# Altium PCB lb-charDisplay-PCB1.PcbDoc
Units mm, origin at the board's own origin, x right, y up, seen from the top; angles counter-clockwise.
Board outline 48 x 70 mm, 2 copper layers (Top Layer, Bottom Layer); 57 components, 58 nets, 230 pads, 272 vias.
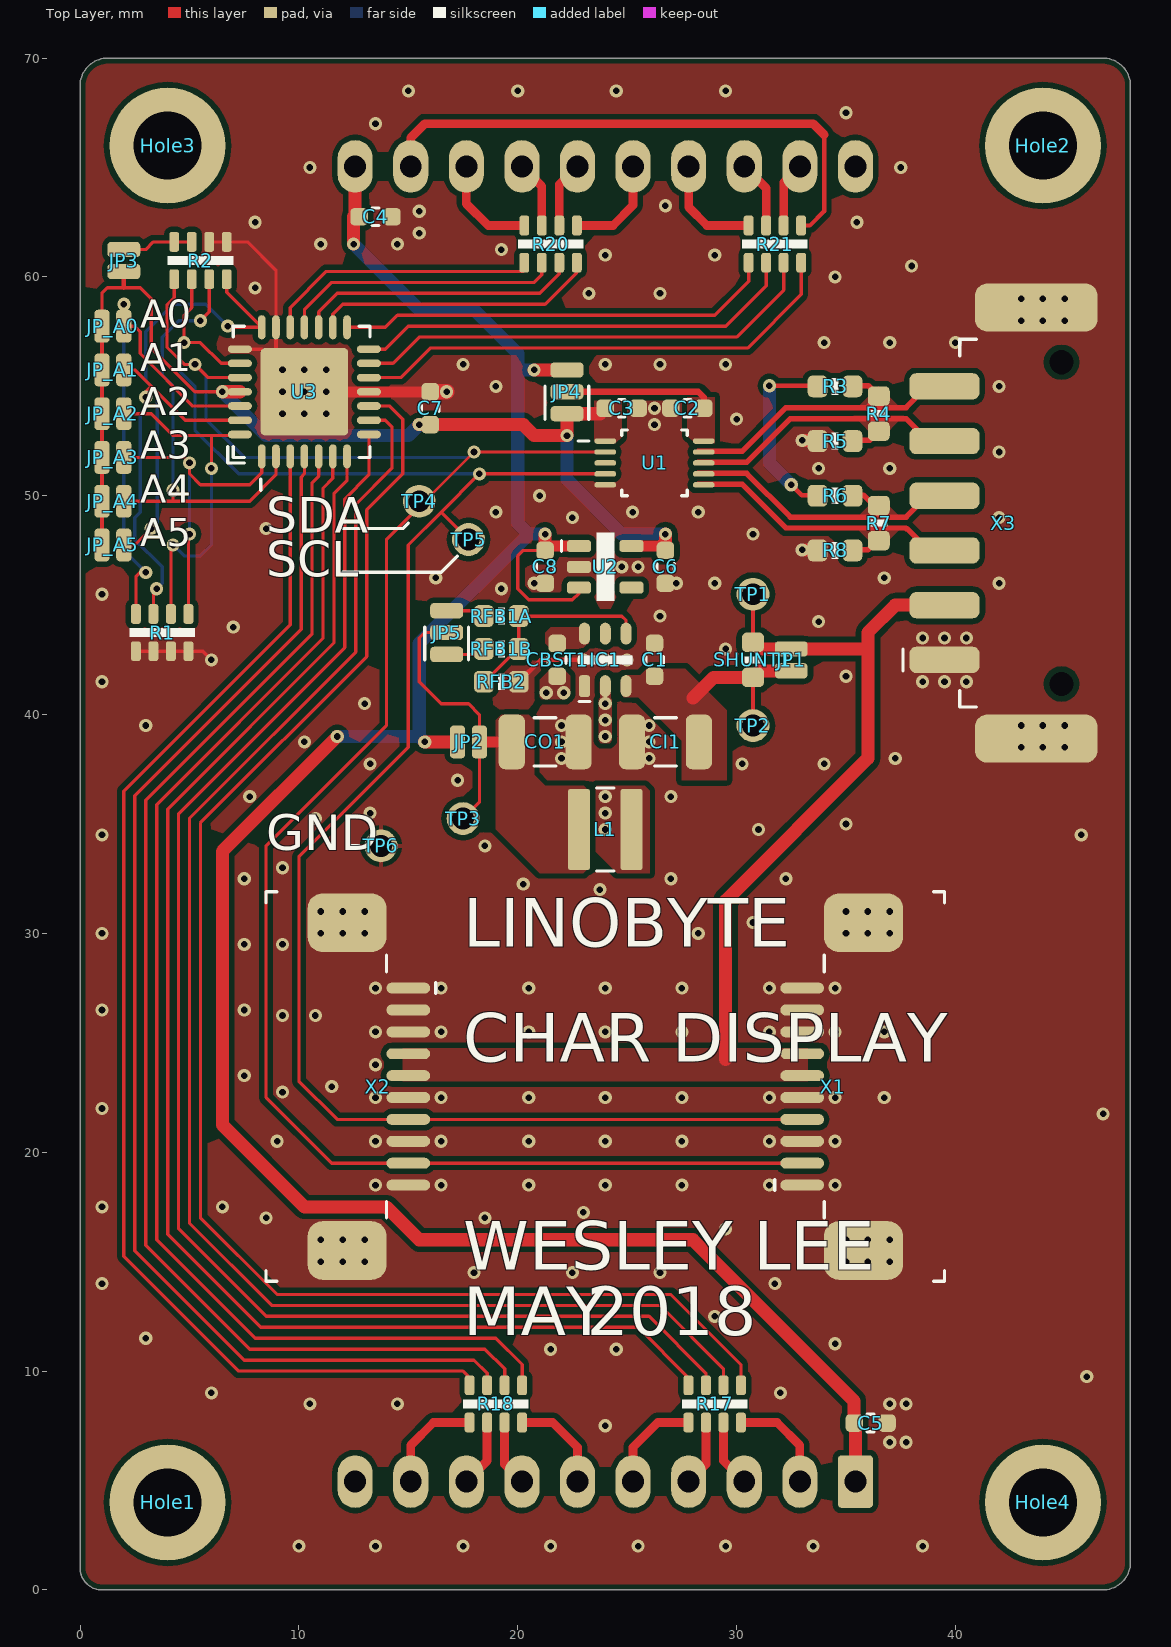
[diagram p0: Top Layer view]
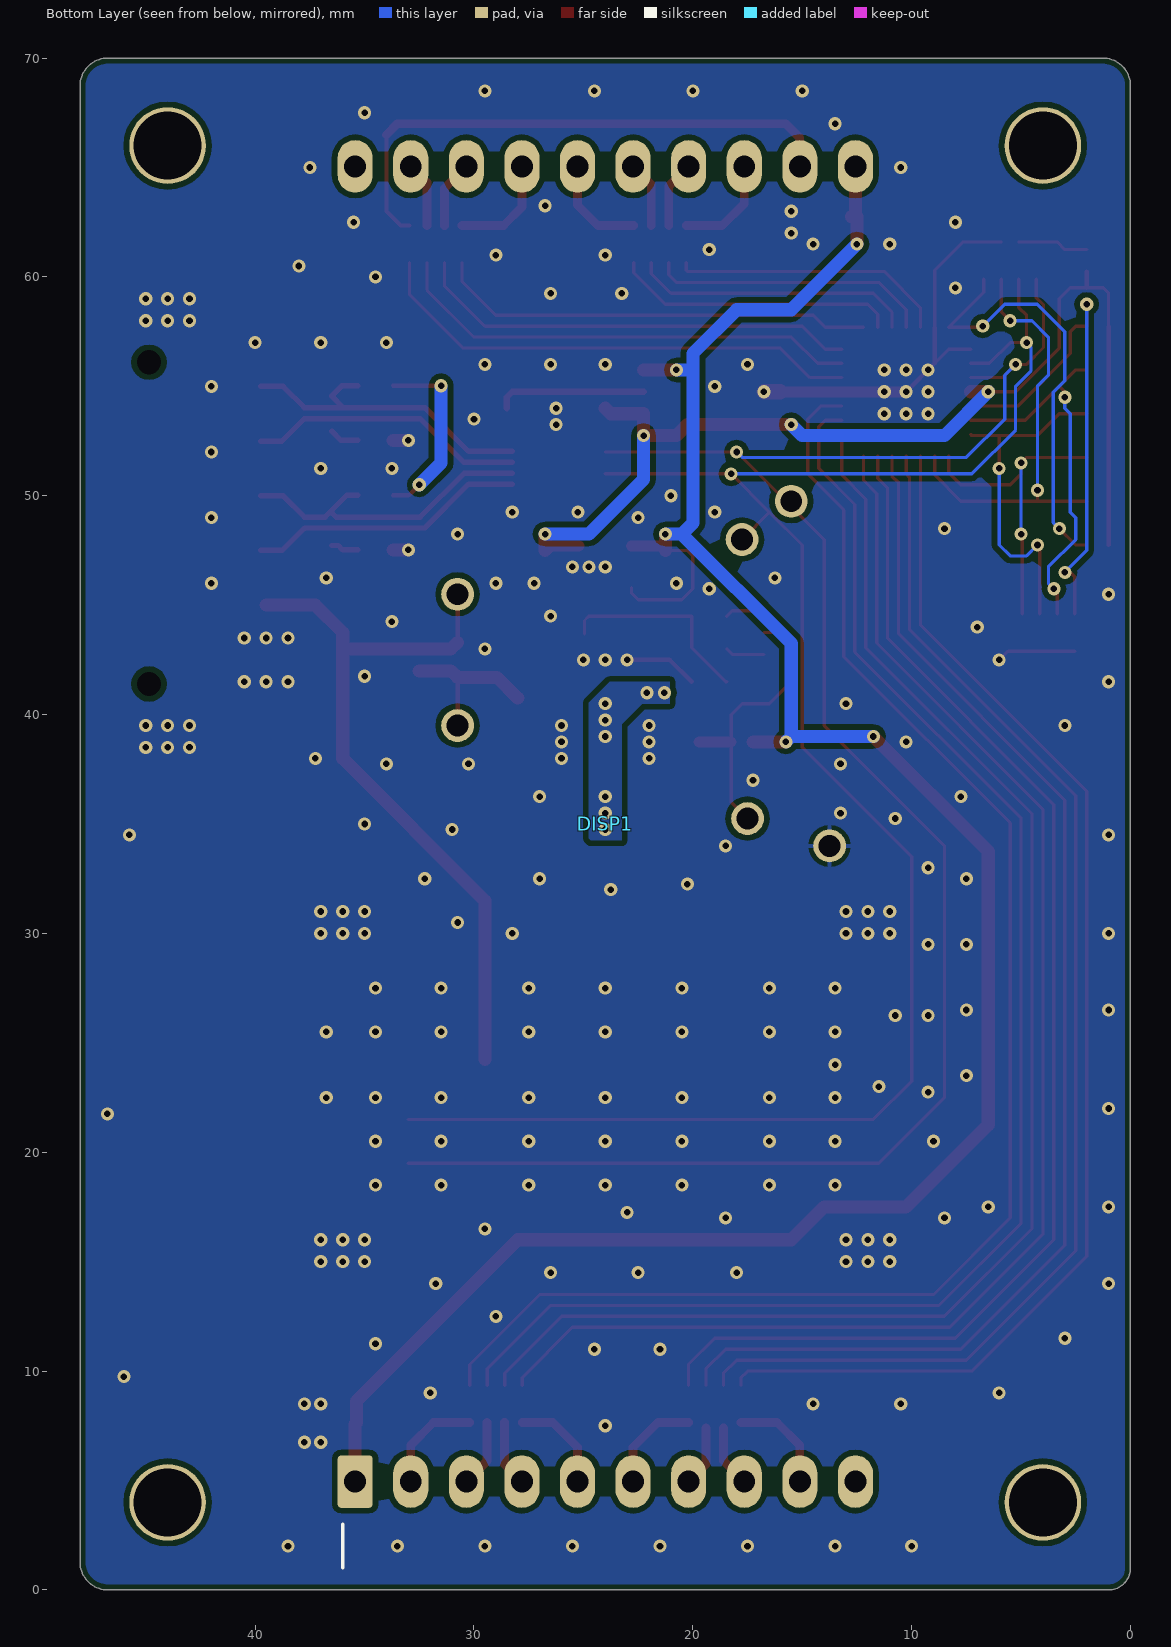
[diagram p1: Bottom Layer view, seen from below]

## Layer stack, top to bottom
Top Solder: solder mask 0.0102, Solder Resist, Dk 3.5
Top Layer: signal copper 0.0356
Dielectric 1: dielectric 0.32, FR-4, Dk 4.8
Bottom Layer: signal copper 0.0356
Bottom Solder: solder mask 0.0102, Solder Resist, Dk 3.5

## Board outline
0,1 0,68.73 cw(c1.27,68.73) 1.27,70 46.73,70 cw(c46.73,68.73) 48,68.73 48,1.27 cw(c46.73,1.27) 46.73,0 1,0 cw(c1,1)

## Design rules (kind name [scope] priority, off if disabled: settings)
BoardOutlineClearance BoardOutlineClearance-Mid [OnLayer('Mid1') or OnLayer('Mid2')] p1: gap=0.5 ignorepadtopadclearanceinfootprint=FALSE
BoardOutlineClearance [All] p2: gap=0.25 ignorepadtopadclearanceinfootprint=FALSE except(0: Arc-SplitContinuation Track-SplitContinuation SMDPad-SplitContinuation THPad-SplitContinuation Via-SplitContinuation Fill-SplitContinuation Poly-SplitContinuation Region-SplitContinuation Text-SplitContinuation)
Clearance Clearance-xPP-xTP-xTT [All] p1: gap=0.15 ignorepadtopadclearanceinfootprint=FALSE except(0: Arc-Hole Track-Hole SMDPad-Hole THPad-Hole Via-Hole Fill-Hole Poly-Hole Region-Hole Text-Hole; 0.25: Arc-Fill Arc-Poly Arc-Region Track-Fill Track-Poly Track-Region SMDPad-Fill SMDPad-Poly SMDPad-Region THPad-Fill THPad-Poly THPad-Region Via-Fill Via-Poly Via-Region Fill-Fill Fill-Poly Fill-Region Poly-Poly Poly-Region Region-Region)
ComponentClearance [All] p1: gap=0.25 collisioncheckmode=3 verticalgap=0.25 showdistances=FALSE
DiffPairsRouting USB_DiffPairsRouting [InDifferentialPair ('USB') or InDifferentialPair ('DI') or InDifferentialPair ('DSCL') or InDifferentialPair ('DSDA')] p1: maxlimit=0.25 minlimit=0.25 mostfreqgap=0.25 toplayer_minwidth=0.25 toplayer_maxwidth=0.25 toplayer_prefwidth=0.25 bottomlayer_minwidth=0.25 bottomlayer_maxwidth=0.25 bottomlayer_prefwidth=0.25 maxuncoupledlength=12.7
DiffPairsRouting [All] p2: maxlimit=0.254 minlimit=0.254 mostfreqgap=0.254 toplayer_minwidth=0.381 toplayer_maxwidth=0.381 toplayer_prefwidth=0.381 bottomlayer_minwidth=0.381 bottomlayer_maxwidth=0.381 bottomlayer_prefwidth=0.381 maxuncoupledlength=12.7
Height [All] p1: minheight=0 maxheight=25 prefheight=12.5
HoleSize HoleSize-PTH [All] p1: absolutevalues=TRUE maxlimit=6 minlimit=0.25 maxpercent=80.000 minpercent=20.000
HoleToHoleClearance [All] p1: gap=0.35 allowstackedmicrovias=FALSE
MinimumAnnularRing "Minimum IAR  >0.45mm" [((ObjectKind = 'Pad') OR (ObjectKind = 'Via')) And (Layer = 'MultiLayer') And (HoleDiameter > AsMM(0.45))] p1: minimumring=0.175 // minimum inner annular ring for pads > 0.45mm finished hole size
MinimumAnnularRing "Minimum IAR <=0.45mm" [((ObjectKind = 'Pad') OR (ObjectKind = 'Via')) And (Layer = 'MultiLayer') And (HoleDiameter <= AsMM(0.45))] p2: minimumring=0.15 // minimum inner annular ring for pads <= 0.45mm finished hole size
MinimumSolderMaskSliver [All] p1: minsoldermaskwidth=0.3
PlaneClearance PlaneClearance-IPI [All] p1: clearance=0.5
PlaneConnect [All] p1: planeconnectstyle=Relief reliefexpansion=0.2 reliefentries=4 reliefconductorwidth=0.2 reliefairgap=0.2
PolygonConnect PolygonConnect-xTW [All] p1: thpad.connectstyle=Relief thpad.reliefconductorwidth=0.2 thpad.reliefentries=4 thpad.polygonreliefangle="90 Angle" thpad.airgapwidth=0.2 smdpad.connectstyle=Direct smdpad.reliefconductorwidth=0.2 smdpad.reliefentries=4 smdpad.polygonreliefangle="90 Angle" smdpad.airgapwidth=0.2 via.connectstyle=Direct via.reliefconductorwidth=0.2 via.reliefentries=4 via.polygonreliefangle="90 Angle" via.airgapwidth=0.2
RoutingCorners [All] p1: cornerstyle=45-Degree minsetback=2 maxsetback=2
RoutingVias "RoutingVias 0.3mm" [All] p1: holewidth=0.3 width=0.6 viastyle="Through Hole" minholewidth=0.3 minwidth=0.6 maxholewidth=0.5 maxwidth=0.8 // finishet hole size <= 0.45mm
SilkToSilkClearance [All] p1: silktosilkclearance=0.2
SilkToSolderMaskClearance SilkscreenOverComponentPads [IsPad] p1: minsilkscreentomaskgap=0.15 clearancetoexposedcopper=TRUE
SolderMaskExpansion "0.3mm Via" [(ObjectKind = 'Via') And (HoleDiameter = AsMM(0.3))] p1: expansion=-0.15 soldermaskfromhole=TRUE
SolderMaskExpansion [All] p2: expansion=0
UnRoutedNet [All] p1: checkbadconnections=TRUE
Width Width-xTW [All] p1: maxlimit=1.5 minlimit=0.15 preferedwidth=0.2
18 further rules are at their usual default settings.

## Classes and differential pairs
component class U_lb-charDisp-SMPS5V: C1 CBST1 CI1 CO1 IC1 JP1 JP2 JP5 L1 RFB1A RFB1B RFB2 SHUNT1 TP1 TP2 TP3
component class lb-charDisp-topLevel: C2 C3 C4 C5 C6 C7 C8 DISP1 Hole1 Hole2 Hole3 Hole4 JP3 JP4 JP_A0 JP_A1 JP_A2 JP_A3 JP_A4 JP_A5 R1 R2 R3 R4 R5 R6 R7 R8 R17 R18 R20 R21 TP4 TP5 TP6 U1 U2 U3 X1 X2 X3
differential pair DSDA: +DSDA_P -DSDA_N
differential pair DSCL: +DSCL_P -DSCL_N

## Components (designator, comment, footprint, x,y, rotation, side; value= is the part's Value field where it differs from the comment)
C1 "100nF" C0603_N 26.25,42.5 r90 top
C2 "100nF" C0603_N 27.75,54 r180 top
C3 "100nF" C0603_N 24.75,54 r0 top
C4 "100nF" C0603_N 13.5,62.75 r0 top
C5 "100nF" C0603_N 36.124,7.626 r0 top
C6 "100nF" C0603_N 26.75,46.75 r270 top
C7 "100nF" C0603_N 16,54 r90 top
C8 "100nF" C0603_N 21.25,46.75 r270 top
CBST1 "100nF" C0603_N 21.8,42.5 r270 top
CI1 "10uF 50V" C1210_N 26.75,38.75 r180 top
CO1 "22uF 10V" C1210_N 21.25,38.75 r0 top
DISP1 "16 Segment Display" PSA23-11SRWA 24,35 r180 bottom locked
Hole1 "=Footprint" Insert-Thread-SMD-M2 4,4 r0 top
Hole2 "=Footprint" Insert-Thread-SMD-M2 44,66 r0 top
Hole3 "=Footprint" Insert-Thread-SMD-M2 4,66 r0 top
Hole4 "=Footprint" Insert-Thread-SMD-M2 44,4 r0 top
IC1 "TPS54308" SOT23 24,42.5 r90 top
JP1 "Jumper 2W" "Jumper SMD 2W NO" 32.5,42.5 r270 top
JP2 "Jumper 2W" "Jumper SMD 2W NO" 17.75,38.75 r180 top
JP3 "Jumper 2W" "Jumper SMD 2W NO" 2,60.75 r90 top
JP4 "Jumper 3W" "Jumper SMD 3W NO" 22.25,54.75 r90 top
JP5 "Jumper 3W" "Jumper SMD 3W NO" 16.75,43.75 r90 top
JP_A0 "Jumper 2W" "Jumper SMD 2W NO" 1.5,57.75 r0 top
JP_A1 "Jumper 2W" "Jumper SMD 2W NO" 1.5,55.75 r0 top
JP_A2 "Jumper 2W" "Jumper SMD 2W NO" 1.5,53.75 r0 top
JP_A3 "Jumper 2W" "Jumper SMD 2W NO" 1.5,51.75 r0 top
JP_A4 "Jumper 2W" "Jumper SMD 2W NO" 1.5,49.75 r0 top
JP_A5 "Jumper 2W" "Jumper SMD 2W NO" 1.5,47.75 r0 top
L1 "Inductor" "Inductor 4mm" 24,34.75 r180 top value=15uH
R1 "; 4k7" YC164 3.75,43.75 r180 top value=4k7
R2 "; 4k7" YC164 5.5,60.75 r0 top value=4k7
R3 "600" R0603 34.5,55 r180 top
R4 "120" R0603 36.5,53.75 r90 top
R5 "600" R0603 34.5,52.5 r0 top
R6 "600" R0603 34.5,50 r180 top
R7 "120" R0603 36.5,48.75 r90 top
R8 "600" R0603 34.5,47.5 r0 top
R17 "Resistor Array - 4P" YC164 29,8.5 r0 top
R18 "Resistor Array - 4P" YC164 19,8.5 r0 top
R20 "Resistor Array - 4P" YC164 21.5,61.5 r180 top
R21 "Resistor Array - 4P" YC164 31.75,61.5 r180 top
RFB1A "" R0603 19.25,44.5 r180 top
RFB1B "100k" R0603 19.25,43 r180 top
RFB2 "22k" R0603 19.25,41.5 r180 top
SHUNT1 "0R5" R0603 30.75,42.5 r270 top
TP1 "Test Point" TestPoint-1.2mm 30.75,45.5 r180 top
TP2 "Test Point" TestPoint-1.2mm 30.75,39.5 r270 top
TP3 "Test Point" TestPoint-1.2mm 17.5,35.25 r270 top
TP4 "Test Point" TestPoint-1.2mm 15.5,49.75 r90 top
TP5 "Test Point" TestPoint-1.2mm 17.75,48 r90 top
TP6 "Test Point" TestPoint-1.2mm 13.75,34 r90 top
U1 "PCA9615" TSSOP10 26.25,51.5 r0 top
U2 "TPS70933" SOT23-5_N 24,46.75 r0 top
U3 "HVQFN28" QFN28 10.25,54.75 r90 top
X1 "Connector 10W - TAB" "FPC Conn. 10W 1-84953-0" 33,23 r90 top
X2 "Connector 10W - TAB" "FPC Conn. 10W 1-84953-0" 15,23 r270 top
X3 "1778803" PTSM-6W-H-SMD 39.5,48.75 r90 top

## Footprints (in the part's own frame and the unit in brackets; to place one, negate y for a bottom-side part, rotate by r counter-clockwise, add the part's x,y. Pads: shape width x height; smd on the part's side, far side on the other; paste and mask are expansions set on the pad)
C0603_N [mm] "Capacitor, Yageo CC Class2, SM0603, IPC Medium Density"
  rrect50% 0.8x0.8 smd: 1(-0.75,0) 2(0.75,0)
  silkscreen extent -0.15,-0.4 0.15,0.4, body extent -0.9,-0.5 0.9,0.5, height 0.9
C1210_N [mm] "Capacitor, Yageo CC Class2, SM1210, IPC Medium Density"
  rrect50% 1.2x2.5 smd: 1(-1.527,0) 2(1.527,0)
  silkscreen extent -0.5,-1.1 0.5,1.1, body extent -1.75,-1.35 1.75,1.35, height 1.8
"FPC Conn. 10W 1-84953-0" [mm] "10W TE FPC Connector SMD Right angle 1mm"
  rrect100% 0.5x2 smd: 1(-4.5,0) 2(-3.5,0) 3(-2.5,0) 4(-1.5,0) 5(-0.5,0) 6(0.5,0) 7(1.5,0) 8(2.5,0) 9(3.5,0) 10(4.5,0)
  rrect50% 2.68x3.6 smd: TAB(-7.49,-2.8) TAB(7.49,-2.8)
  silkscreen extent -8.9,-6.5 8.9,1.25, body extent -8.96,-6.55 8.96,0, height 2.56
"Inductor 4mm" [mm] "3mm x 3mm, 4x4mm, WE-MAPI, Murata LQH3NPN, etc"
  rrect20% 1x3.7 smd: 1(-1.2,0) 2(1.2,0)
  silkscreen extent -0.4,-1.9 0.4,1.9, body extent -2.05,-2.05 2.05,2.05, height 3
Insert-Thread-SMD-M2 [mm] "Wurth WA-SMSI"
  round 5.3 / inner round 3.5 / far side round 3.5 hole 3.1 paste-4 mask+0.102: 1(0,0)
"Jumper SMD 2W NO" [mm]
  rrect50% 0.7x1.5 smd paste-1: 1(-0.5,0) 2(0.5,0)
"Jumper SMD 3W NO" [mm]
  rrect50% 0.7x1.5 smd paste-1: 1(-1,0) 2(0,0) 3(1,0)
  silkscreen extent -1.25,-1 0.25,1
PSA23-11SRWA [mm] "16 Segment Display, 70mmx50mm"
  rrect20% 1.6x2.4 hole 1: 1(-11.43,-30.05)
  rrect100% 1.6x2.4 hole 1: 2(-8.89,-30.05) 3(-6.35,-30.05) 4(-3.81,-30.05) 5(-1.27,-30.05) 6(1.27,-30.05) 7(3.81,-30.05) 8(6.35,-30.05) 9(8.89,-30.05) 10(11.43,-30.05) 11(11.43,30.05) 12(8.89,30.05) 13(6.35,30.05) 14(3.81,30.05) 15(1.27,30.05) 16(-1.27,30.05) 17(-3.81,30.05) 18(-6.35,30.05) 19(-8.89,30.05) 20(-11.43,30.05)
  silkscreen extent -12,-34 -12,-32
PTSM-6W-H-SMD [mm]
  rrect50% 1.2x3.2 smd: 1(-6.25,0) 2(-3.75,0) 3(-1.25,0) 4(1.25,0) 5(3.75,0) 6(6.25,0)
  rrect20% 0x0 hole 1.1: 163(-7.35,-5.35) 163(7.35,-5.35)
  rrect50% 2.2x5.6 smd: TAB(-9.85,-4.2) TAB(9.85,-4.2)
  silkscreen extent -8.4,-1.45 8.4,1.9, body extent -10.3,-8.25 10.3,1.25, height 5
QFN28 [mm]
  rrect100% 1.1x0.35 smd: 1(-2.95,1.95) 2(-2.95,1.3) 3(-2.95,0.65) 4(-2.95,0) 5(-2.95,-0.65) 6(-2.95,-1.3) 7(-2.95,-1.95) 15(2.95,-1.95) 16(2.95,-1.3) 17(2.95,-0.65) 18(2.95,0) 19(2.95,0.65) 20(2.95,1.3) 21(2.95,1.95)
  rrect100% 0.35x1.1 smd: 8(-1.95,-2.95) 9(-1.3,-2.95) 10(-0.65,-2.95) 11(0,-2.95) 12(0.65,-2.95) 13(1.3,-2.95) 14(1.95,-2.95) 22(1.95,2.95) 23(1.3,2.95) 24(0.65,2.95) 25(0,2.95) 26(-0.65,2.95) 27(-1.3,2.95) 28(-1.95,2.95)
  rrect10% 4x4 smd paste-3: PAD(0,0)
  silkscreen extent -4.5,-3 3,3.5, body extent -3,-3 3,3.25, height 1.04
R0603 [mm] "Chip Resistor; Body 1.6 x 0.9 mm (LxW typ)"
  rrect50% 0.9x1 smd: 1(-0.8,0) 2(0.8,0)
  silkscreen extent -0.15,-0.38 0.15,0.38, body extent -0.8,-0.4 0.8,0.4, height 0.45
SOT23 [mm]
  rrect50% 1x0.5 smd: 1(-1.2,0.95)
  oval 1x0.5 smd: 2(-1.2,0) 3(-1.2,-0.95) 4(1.2,-0.95) 5(1.2,0) 6(1.2,0.95)
  silkscreen extent -1.9,-1.25 0.2,1.25, body extent -1.4,-1.45 1.4,1.45, height 1.26
SOT23-5_N [mm] "SOT23, 5-Leads, Body 2.9x1.6mm, Pitch 0.95mm, Lead Span 2.8mm, IPC Medium Density"
  rrect50% 1.1x0.55 smd: 1(-1.2,0.95) 2(-1.2,0) 3(-1.2,-0.95) 4(1.2,-0.95) 5(1.2,0.95)
  silkscreen extent -2,-1.55 0.4,1.55, body extent -0.9,-1.55 0.9,1.55, height 1.45
TestPoint-1.2mm [mm]
  round 1.5 hole 1: 1(0,0)
TSSOP10 [mm]
  rrect100% 1x0.25 smd: 1(-2.25,1) 2(-2.25,0.5) 3(-2.25,0) 4(-2.25,-0.5) 5(-2.25,-1) 6(2.25,-1) 7(2.25,-0.5) 8(2.25,0) 9(2.25,0.5) 10(2.25,1)
  silkscreen extent -3.5,-1.5 1.5,1.5, body extent -2.5,-1.5 2.5,1.5, height 1.1
YC164 [mm] "4 × 0603 (8P4R)  Resistor Array SMD"
  rrect50% 0.45x0.9 smd: 1(-1.2,-0.85) 2(-0.4,-0.85) 3(0.4,-0.85) 4(1.2,-0.85) 5(1.2,0.85) 6(0.4,0.85) 7(-0.4,0.85) 8(-1.2,0.85)
  silkscreen extent -1.5,-0.2 1.5,0.2, body extent -1.68,-0.88 1.68,0.88, height 0.71

## Part data
C1 C2 C3 C4 C5 C6 C7 C8 CBST1 CI1 CO1: library part Capacitor, "Capacitor MLCC", Manufacturer=Yageo, Manufacturer Part Number=CC0603KRX7R9BB104, Package=0603, Supplier Part Number 1=1362556, Tolerance (%)=10, Category=Capacitor, ComponentLink1Description="Manufacturer Website", ComponentLink1URL=http://www.yageo.com, Supplier 1=Farnell, Supplier 2=Digi-Key, Supplier Part Number 2=311-1344-1-ND
DISP1: library part "Display 16 Segment"
Hole1 Hole2 Hole3 Hole4: library part Hole
IC1: "Buck Converter"
R1 R2: library part "Resistor Array - 4P"
R3 R4 R5 R6 R7 R8 RFB1A RFB1B RFB2 SHUNT1: library part Resistor, PackageDocument=Mar-2003, Code_IPC="1608 [0603]", ComponentLink1Description="Manufacturer Link", ComponentLink1URL=http://www.panasonic.com/industrial/components/resistive_products.htm, ComponentLink2Description=Datasheet, ComponentLink2URL=http://www.panasonic.com/industrial/components/pdf/AOA0000CE2.pdf, LatestRevisionDate=19-Mar-2004, LatestRevisionNote="Silkscreen size reduced.", PackageReference=3-0603, Published=17-Dec-2003, Publisher="Altium Limited"
U1: library part PCA9615DP
U2: library part XC6222
U3: library part PCA9685
X3: library part "Connector 6W - TAB"

## Via types
v1: diameter 0.6, hole 0.3, Top Layer to Bottom Layer, 272 vias

## Nets (pads, with @x,y where several pads share a name; then routed paths per layer and width w, separated by ;. In a path a pad name is that pad's centre, name@x,y a point inside that pad or via, vN(x,y) a via of type N, cw(c..) or ccw(c..) an arc to the next point about the centre after c; other vN are vias at no path point)
+3V3: C3.1 C6.1 C7.1 JP3.1 JP4.1 JP_A0.1 JP_A1.1 JP_A2.1 JP_A3.1 JP_A4.1 JP_A5.1 U1.1 U2.5 U3.25 | length 51.7
  Top Layer w0.15: JP_A0.1 1,59.25 1.25,59.5 2,59.5 2.75,59.5 3.25,59 3.25,56.75 5.25,54.75 v1(6.5,54.75)
  Top Layer w0.2: JP_A5.1 JP_A4.1 JP_A3.1 JP_A2.1 JP_A1.1 JP_A0.1 ; 2,59.5 JP3.1
  Top Layer w0.5: U2.5 C6.1@26.55,47.7
  Top Layer w0.6: v1(6.5,54.75) U3.25 ; v1(15.5,53.25) C7.1 20.25,53.25 20.75,52.75 v1(22.25,52.75) JP4.1 23.75,53.75 C3.1 ; C6.1@26.55,47.7 C6.1 v1(26.75,48.25)
  Bottom Layer w0.6: v1(6.5,54.75) 8.5,52.75 15,52.75 v1(15.5,53.25) ; v1(22.25,52.75) 22.25,50.75 24.75,48.25 v1(26.75,48.25)
+15VIN: JP1.1 SHUNT1.1 TP1.1 X1.6 X1.7 X2.4 X2.5 X3.2 | length 33.8
  Top Layer w0.2: SHUNT1.1 TP1.1
  Top Layer w0.6: 29.5,24.25 29.5,31.5 36,38 36,43 ; SHUNT1.1 31.05,43 JP1.1 36,43 ; X3.2 37.25,45 36,43.75 36,43
+SMPS: C4.1 C5.1 C8.1 DISP1.1 DISP1.11 JP2.2 JP4.3 U2.1 U2.3 | length 108.2
  Top Layer w0.15: C8.1@21.45,47.7 C8.1 20.25,47.5 20,47.25 20,45.75 20.5,45.25 22.5,45.25 22.8,45.55 U2.3
  Top Layer w0.5: C8.1@21.45,47.7 U2.1
  Top Layer w0.6: v1(11.75,39) 6.5,33.75 6.5,21.25 10.25,17.5 14,17.5 15.5,16 28,16 35.374,8.626 C5.1 35.43,7.569 DISP1.1 ; v1(12.5,61.5) 12.5,62.75 C4.1 12.57,62.93 DISP1.11 ; v1(15.75,38.75) JP2.2 ; v1(20.75,55.75) JP4.3 ; C8.1 v1(21.25,48.25)
  Bottom Layer w0.6: v1(11.75,39) 15.5,39 ; v1(12.5,61.5) 15.5,58.5 18,58.5 20,56.5 20,55.75 ; v1(15.75,38.75) 15.5,39 ; v1(20.75,55.75) 20,55.75 ; v1(21.25,48.25) 20.5,48.25 ; 15.5,39 15.5,43.25 20.5,48.25 ; 20,55.75 20,48.75 20.5,48.25
A1: R21.5 U3.15 | length 20.1
  Top Layer w0.15: U3.15 13.95,57.7 14.5,58.25 29,58.25 30.55,59.8 R21.5
A2: R20.6 U3.18 | length 12.9
  Top Layer w0.15: U3.18 10.25,58.5 11.5,59.75 20.75,59.75 21.1,60.1 R20.6
B: R20.5 U3.19 | length 12.7
  Top Layer w0.15: U3.19 9.6,58.6 11.25,60.25 20.25,60.25 20.3,60.3 R20.5
C: R18.8 U3.3 | length 58.1
  Top Layer w0.15: U3.3 9.6,44.1 2,36.5 2,15.25 7.25,10 17.5,10 17.8,9.7 R18.8
D1: R17.7 U3.8 | length 67.3
  Top Layer w0.15: U3.8 13.2,50.95 12.1,49.85 12.1,43.064 4.5,35.464 4.5,16.5 8.5,12.5 26,12.5 28.6,9.9 R17.7
D2: R18.6 U3.5 | length 58.8
  Top Layer w0.15: U3.5 10.9,50.9 10.6,50.6 10.6,43.686 3,36.086 3,15.75 7.75,11 18.5,11 19.4,10.1 R18.6
DSCL_N: R7.1 R8.2 U1.6 X3.3 | length 14
  Top Layer w0.25: U1.6@28.25,50.527 30.25,50.527 32.25,48.527 37.723,48.527 37.75,48.5 37.777,48.5 38.777,47.5 X3.3@39.749,47.5 ; R8.2@35.3,47.527 36,47.527 36.2,47.727 R7.1@36.5,47.727
DSCL_P: R6.1 R7.2 U1.7 X3.4 | length 14.5
  Top Layer w0.25: U1.7@28.25,51.027 30.457,51.027 32.457,49.027 36.3,49.027 R7.2@36.55,49.277 ; R6.1@35.3,50.027 35.8,50.027 R7.2@36.55,49.277 ; X3.4@39.749,50 38.723,50 37.75,49.027 36.8,49.027 R7.2@36.55,49.277
DSDA_N: R3.1 R4.2 U1.9 X3.6 | length 14.9
  Top Layer w0.25: U1.9@28.25,52.027 30.25,52.027 32.25,54.027 35.977,54.027 ; R3.1@35.3,55.027 36.023,55.027 R4.2 35.977,54.027 ; X3.6@39.749,55 38.723,55 37.75,54.027 35.977,54.027
DSDA_P: R4.1 R5.2 U1.8 X3.5 | length 14.1
  Top Layer w0.25: U1.8@28.25,51.527 30.457,51.527 32.457,53.527 35.923,53.527 37.75,53.527 38.777,52.5 X3.5@39.749,52.5 ; R5.2@35.3,52.527 36.077,52.527 R4.1
E: R17.6 U3.9 | length 69.3
  Top Layer w0.15: U3.9 13.95,53.45 14.25,53.15 14.25,51.25 12.6,49.6 12.6,42.857 5,35.257 5,16.75 8.75,13 26.5,13 29.4,10.1 R17.6
F: R21.7 U3.13 | length 21.6
  Top Layer w0.15: U3.13 14.3,56.05 15.5,57.25 30,57.25 32.15,59.4 R21.7
FB: IC1.4 RFB1A.1 RFB1B.1 RFB2.2 | length 9.3
  Top Layer w0.15: RFB2.2 18.5,41.5 20.05,43.05 RFB1A.1 24.75,44.5 24.95,44.3 IC1.4
G: R21.6 U3.14 | length 20.4
  Top Layer w0.15: U3.14 13.95,56.7 15,57.75 29.5,57.75 31.35,59.6 R21.6
GND: C1.2 C2.2 C3.2 C4.2 C5.2 C6.2 C7.2 C8.2 CI1.2 CO1.2 IC1.1 R1.5 R1.6 R1.7 R1.8 R2.5 R2.6 R5.1 R8.1 RFB2.1 TP6.1 U1.5 U2.2 U3.11 U3.20 U3.22 U3.PAD X1.1 X1.3 X1.5 X1.8 X1.9 X1.10 X1.TAB X2.1 X2.2 X2.3 X2.6 X2.8 X2.10 X2.TAB X3.1 X3.TAB | length 26.2
  Top Layer w0.15: R1.5 R1.6 R1.7 R1.8 5.6,42.9 v1(6,42.5) ; R2.6 R2.5 7.65,61.6 8.95,60.3 U3.20 ; U3.22 8.3,56.7 U3.PAD@8.95,56.05
  Top Layer w0.2: U3.20 8.95,56.05 v1(10.25,54.75) ; RFB2.1 21.05,42.5 v1(23,42.5)
  Top Layer w0.5: v1(10.25,54.75) U3.11 C7.2@15.75,54.75
  Top Layer w0.6: v1(33,47.527) R8.1@33.7,47.527 ; v1(33,52.527) R5.1@33.7,52.527
  Top Layer w0.7: C7.2 v1(16.75,54.75)
  other v1: 10,2 13.5,2 17.5,2 21.5,2 25.5,2 29.5,2 33.5,2 38.5,2 37,6.75 37.75,6.75 24,7.5 10.5,8.5 14.5,8.5 37,8.5 37.75,8.5 6,9 32,9 46,9.75 21.5,11 24.5,11 34.5,11.25 3,11.5 29,12.5 1,14 31.75,14 18,14.5 22.5,14.5 26.5,14.5 11,15 12,15 13,15 35,15 36,15 37,15 11,16 12,16 13,16 35,16 36,16 37,16 29.5,16.5 8.5,17 18.5,17 23,17.25 1,17.5 6.5,17.5 13.5,18.5 16.5,18.5 20.5,18.5 24,18.5 27.5,18.5 31.5,18.5 34.5,18.5 9,20.5 13.5,20.5 16.5,20.5 20.5,20.5 24,20.5 27.5,20.5 31.5,20.5 34.5,20.5 46.75,21.75 1,22 13.5,22.5 16.5,22.5 20.5,22.5 24,22.5 27.5,22.5 31.5,22.5 34.5,22.5 36.75,22.5 9.25,22.75 11.5,23 7.5,23.5 13.5,24 13.5,25.5 16.5,25.5 20.5,25.5 24,25.5 27.5,25.5 31.5,25.5 34.5,25.5 36.75,25.5 9.25,26.25 10.75,26.25 1,26.5 7.5,26.5 13.5,27.5 16.5,27.5 20.5,27.5 24,27.5 27.5,27.5 31.5,27.5 34.5,27.5 7.5,29.5 9.25,29.5 1,30 11,30 12,30 13,30 28.25,30 35,30 36,30 37,30 30.75,30.5 11,31 12,31 13,31 35,31 36,31 37,31 23.75,32 20.25,32.25 7.5,32.5 27,32.5 32.25,32.5 9.25,33 18.5,34 1,34.5 45.75,34.5 31,34.75 35,35 10.75,35.25 13.25,35.5 7.75,36.25 27,36.25 17.25,37 13.25,37.75 30.25,37.75 34,37.75 22,38 26,38 37.25,38 43,38.5 44,38.5 45,38.5 10.25,38.75 22,38.75 26,38.75 3,39.5 22,39.5 26,39.5 43,39.5 44,39.5 45,39.5 13,40.5 1,41.5 38.5,41.5 39.5,41.5 40.5,41.5 35,41.75 24,42.5 25,42.5 29.5,43 38.5,43.5 39.5,43.5 40.5,43.5 7,44 33.75,44.25 26.5,44.5 1,45.5 19.25,45.75 20.75,46 27.25,46 29,46 42,46 16.25,46.25 36.75,46.25 24,46.75 24.75,46.75 25.5,46.75 30.75,48.25 8.5,48.5 22.5,49 42,49 19,49.25 25.25,49.25 28.25,49.25 21,50 33.75,51.25 37,51.25 42,52 26.25,53.25 30,53.5 9.25,53.75 10.25,53.75 11.25,53.75 26.25,54 9.25,54.75 11.25,54.75 19,55 42,55 9.25,55.75 10.25,55.75 11.25,55.75 17.5,56 24,56 26.5,56 29.5,56 34,57 37,57 40,57 43,58 44,58 45,58 43,59 44,59 45,59 23.25,59.25 26.5,59.25 8,59.5 34.5,60 38,60.5 24,61 29,61 19.25,61.25 11,61.5 14.5,61.5 15.5,62 8,62.5 35.5,62.5 15.5,63 26.75,63.25 10.5,65 37.5,65 13.5,67 35,67.5 15,68.5 20,68.5 24.5,68.5 29.5,68.5
H: R20.8 U3.16 | length 13
  Top Layer w0.15: U3.16 11.55,58.3 12,58.75 21.25,58.75 22.7,60.2 R20.8
J: R20.7 U3.17 | length 12.9
  Top Layer w0.15: U3.17 10.9,58.4 11.75,59.25 21,59.25 21.9,60.15 R20.7
K: R21.8 U3.12 | length 22.8
  Top Layer w0.15: U3.12 14.65,55.4 16,56.75 30.5,56.75 32.95,59.2 R21.8
L: R18.7 U3.4 | length 58.5
  Top Layer w0.15: U3.4 10.25,51 10.1,50.85 10.1,43.893 2.5,36.293 2.5,15.5 7.5,10.5 18,10.5 18.6,9.9 R18.7
M: R18.5 U3.6 | length 59.1
  Top Layer w0.15: U3.6 11.55,50.8 11.1,50.35 11.1,43.479 3.5,35.879 3.5,16 8,11.5 19,11.5 20.2,10.3 R18.5
N: R17.8 U3.7 | length 65.8
  Top Layer w0.15: U3.7 12.2,50.7 11.6,50.1 11.6,43.272 4,35.672 4,16.25 8.25,12 25.5,12 27.8,9.7 R17.8
NetC1_1: C1.1 CI1.1 IC1.3 JP1.2 SHUNT1.2 TP2.1 | length 7.5
  Top Layer w0.2: TP2.1@30.75,39.25 TP2.1 SHUNT1.2
  Top Layer w0.6: 28,40.75 28.95,41.7 SHUNT1.2 31.05,42 JP1.2
NetC2_1: C2.1 JP4.2 U1.10 | length 6.9
  Top Layer w0.3: JP4.2 28.25,54.75 28.5,54.5 C2.1
NetCBST1_1: CBST1.1 IC1.6
NetCO1_1: CO1.1 JP2.1 JP5.2 L1.2 TP3.1 | length 13.3
  Top Layer w0.15: JP5.2 15.75,43.75 15.5,43.5 15.5,41.5 16.5,40.5 17.75,40.5 18.25,40 JP2.1 18.25,36 TP3.1
  Top Layer w0.5: JP2.1 CO1.1
NetDISP1_2: DISP1.2 R17.4 | length 4.8
  Top Layer w0.4: R17.4 31.85,7.65 32.89,6.61 DISP1.2
NetDISP1_3: DISP1.3 R17.3 | length 3.1
  Top Layer w0.4: R17.3 29.4,5.9 DISP1.3
NetDISP1_4: DISP1.4 R17.2 | length 3
  Top Layer w0.4: DISP1.4 28.6,5.74 R17.2
NetDISP1_5: DISP1.5 R17.1 | length 4.6
  Top Layer w0.4: DISP1.5 25.27,6.52 26.4,7.65 R17.1
NetDISP1_6: DISP1.6 R18.4 | length 4.6
  Top Layer w0.4: R18.4 21.6,7.65 22.73,6.52 DISP1.6
NetDISP1_7: DISP1.7 R18.3 | length 2.8
  Top Layer w0.4: R18.3@19.4,7.4 19.4,5.74 DISP1.7
NetDISP1_8: DISP1.8 R18.2 | length 2.8
  Top Layer w0.4: DISP1.8 18.6,5.9 R18.2@18.6,7.4
NetDISP1_9: DISP1.9 R18.1 | length 4.8
  Top Layer w0.4: DISP1.9 15.11,6.61 16.15,7.65 R18.1
NetDISP1_12: DISP1.12 R21.1 | length 25.5
  Top Layer w0.2: R21.1 33.35,62.35 34,63 34,66.5
  Top Layer w0.4: DISP1.12 15.11,66.36 15.75,67 33.5,67 34,66.5
NetDISP1_13: DISP1.13 R20.4 | length 4.8
  Top Layer w0.4: DISP1.13 17.65,63.35 18.65,62.35 R20.4
NetDISP1_14: DISP1.14 R20.3 | length 3.1
  Top Layer w0.4: DISP1.14 21.1,64.14 R20.3
NetDISP1_15: DISP1.15 R20.2 | length 3
  Top Layer w0.4: R20.2 21.9,64.22 DISP1.15
NetDISP1_16: DISP1.16 R20.1 | length 4.7
  Top Layer w0.4: R20.1 24.35,62.35 25.27,63.27 DISP1.16
NetDISP1_17: DISP1.17 R21.4 | length 4.9
  Top Layer w0.4: DISP1.17 27.81,63.19 28.65,62.35 R21.4
NetDISP1_18: DISP1.18 R21.3 | length 3.1
  Top Layer w0.4: DISP1.18 31.35,64.05 R21.3
NetDISP1_19: DISP1.19 R21.2 | length 3
  Top Layer w0.4: R21.2 32.15,64.31 DISP1.19
NetJP3_2: JP3.2 R2.7 R2.8 | length 3.2
  Top Layer w0.15: JP3.2 3,61.25 3.35,61.6 R2.8 R2.7
NetJP5_1: JP5.1 RFB1B.2 | length 1.8
  Top Layer w0.15: JP5.1 18.2,42.75 RFB1B.2
NetJP5_3: JP5.3 RFB1A.2 | length 1.8
  Top Layer w0.15: JP5.3 18.2,44.75 RFB1A.2
NetJP_A0_2: JP_A0.2 R1.4 U3.26 | length 23.3
  Top Layer w0.15: v1(2,58.75) JP_A0.2 2.5,57.75 2.75,57.5 2.75,56.5 5.15,54.1 U3.26 ; R1.4 2.55,46.3 2.75,46.5 v1(3,46.5)
  Bottom Layer w0.15: v1(2,58.75) 2,47.5 v1(3,46.5)
NetJP_A1_2: JP_A1.2 R1.3 U3.27 | length 17.6
  Top Layer w0.15: JP_A1.2 2.5,55.75 3.25,55 ; v1(3,54.5) 3,54.75 3.25,55 ; R1.3 3.35,45.6 v1(3.5,45.75) ; U3.27 4.8,53.45 3.25,55
  Bottom Layer w0.15: v1(3,54.5) 3,54 2.75,53.75 2.75,49.25 2.5,49 2.5,48 3.75,46.75 3.75,46 v1(3.5,45.75)
NetJP_A2_2: JP_A2.2 R1.2 U3.28 | length 16.1
  Top Layer w0.15: JP_A2.2 3.25,53.75 4.25,52.75 6,52.75 ; R1.2 4.15,47.65 v1(4.25,47.75) ; v1(6,51.25) 6,52.75 ; U3.28 7.25,52.75 6,52.75
  Bottom Layer w0.15: v1(4.25,47.75) 4.75,47.25 5.5,47.25 6,47.75 v1(6,51.25)
NetJP_A3_2: JP_A3.2 R1.1 U3.1 | length 15
  Top Layer w0.15: JP_A3.2 4.75,51.75 v1(5,51.5) 5,51 5.5,50.5 7.75,50.5 8.3,51.05 U3.1 ; R1.1 4.95,48.2 v1(5,48.25)
  Bottom Layer w0.15: v1(5,48.25) v1(5,51.5)
NetJP_A4_2: JP_A4.2 R2.3 U3.2 | length 20.1
  Top Layer w0.15: JP_A4.2 4.25,49.75 ; v1(4.25,50.25) 4.25,49.75 ; v1(5.5,58) 5.9,58.4 R2.3 ; U3.2 8.95,50.95 7.75,49.75 4.25,49.75
  Bottom Layer w0.15: v1(4.25,50.25) 4.25,55 3.75,55.5 3.75,57.25 4.5,58 v1(5.5,58)
NetJP_A5_2: JP_A5.2 R2.4 U3.21 | length 20
  Top Layer w0.15: JP_A5.2 2.5,47.75 v1(3.25,48.5) ; R2.4 6.7,59.3 U3.21 6.8,57.7 v1(6.75,57.75)
  Bottom Layer w0.15: v1(3.25,48.5) 3.525,48.775 3.525,54.725 3,55.25 3,57.5 4.25,58.75 5.75,58.75 v1(6.75,57.75)
NetR3_2: R3.2 R6.2 | length 8.5
  Top Layer w0.2: v1(31.5,55.027) R3.2@33.7,55.027 ; v1(32.5,50.5) 32.973,50.027 R6.2@33.7,50.027
  Bottom Layer w0.6: v1@31.5,55 31.5,51.5 v1(32.5,50.5)
P: R17.5 U3.10 | length 70.6
  Top Layer w0.15: U3.10 14.15,54.1 14.75,53.5 14.75,51 13.1,49.35 13.1,42.65 5.5,35.05 5.5,17 9,13.5 27,13.5 30.2,10.3 R17.5
SCL: R2.2 TP5.1 U1.4 U3.23 X1.4 X2.7 | length 86.6
  Top Layer w0.15: R2.2 5.1,58.6 4.75,58.25 v1(4.75,57) 5.5,57 6.45,56.05 U3.23 ; TP5.1 16.5,49.25 ; U1.4 v1(18.25,51) 16.5,49.25 ; X1.4 X2.7 11.75,21.5 10,23.25 10,33.5 15,38.5 15,47.75 16.5,49.25
  Bottom Layer w0.15: v1(4.75,57) 4.55,56.8 4.55,55.7 5.25,55 5.25,53 7.25,51 v1(18.25,51)
SDA: R2.1 TP4.1 U1.2 U3.24 X1.2 X2.9 | length 88.1
  Top Layer w0.15: R2.1 4.3,59.05 3.975,58.725 3.975,56.775 4.75,56 v1(5.25,56) 5.85,55.4 U3.24 ; U1.2 v1(18,52) 14,48 14,39.5 8.5,34 8.5,22.5 11.5,19.5 X2.9 X1.2
  Bottom Layer w0.15: v1(5.25,56) 5.75,55.5 5.75,53.5 7.5,51.75 17.75,51.75 v1(18,52)
SW1: CBST1.2 IC1.2 L1.1
  other v1: 24,34.75 24,35.5 24,36.25 24,39 24,39.75 24,40.5 21.3,41 22.1,41
pads on no net: DISP1.10 DISP1.20 Hole1.1 Hole2.1 Hole3.1 Hole4.1 IC1.5 U1.3 U2.4 X3.163

## Polygon pours and split planes (outlines as drawn)
GND on Top Layer "Top Layer-GND 2" (solid, remove dead copper, pour order 42): 0,0 0,70 48,70 48,0
GND on Top Layer "Top Layer-GND 3" (solid, pour order 40): 20.75,45.5 21.5,45.5 22.25,46.25 25.75,46.25 26.5,45.5 27.25,45.5 27.25,47 20.75,47
NetCBST1_1 on Top Layer "Top Layer-NetCBST1_1" (solid, pour order 38): 23.25,44 23.25,43.25 23,43 21.5,43 21.25,43.25 21.25,43.75 21.5,44
NetCO1_1 on Top Layer "Top Layer-NetCO1_1" (solid, pour order 36): 20.5,40 20.75,39.75 20.75,37.25 21.25,36.75 23,36.75 23.25,36.5 23.25,33 23,32.75 21,32.75 19,34.75 19,39.75 19.25,40
GND on Top Layer "Top Layer-GND 11" (solid, pour order 34): 25,54.5 27.5,54.5 27.5,51.277 26.25,50.027 23.5,50.027 23.5,50.777 24.75,50.777 25,51.027
+3V3 on Top Layer "Top Layer-+3V3 4" (solid, pour order 32): 23.5,54.5 23.5,52.377 24.45,52.377 24.75,52.677 24.75,54.5
NetC2_1 on Top Layer "Top Layer-NetC35_1" (solid, pour order 30): 27.75,54.5 27.75,52.75 28.25,52.25 29,52.25 29,54.5
DSDA_N on Top Layer "Top Layer-DSCL_P" (solid, pour order 28): 35.25,53.75 36.5,55 37.75,53.75
DSDA_P on Top Layer "Top Layer-DSCL_N" (solid, pour order 26): 37.75,53.75 36.5,52.5 35.25,53.75
DSCL_P on Top Layer "Top Layer-DSCL_P" (solid, pour order 24): 35.25,48.75 36.5,50 37.75,48.75
DSCL_N on Top Layer "Top Layer-DSCL_N" (solid, pour order 22): 37.6,48.6 36.5,47.5 35.4,48.6
+15VIN on Top Layer "Top Layer-+15VIN" (solid, pour order 20): 14.75,24.75 14.75,23.25 33.25,23.25 33.25,24.75
NetC1_1 on Top Layer "Top Layer-NetC1_1" (solid, pour order 16): 27.5,37 27.5,38.8 25.5,40.8 24.85,40.8 24.7,41 24.7,41.5 24.8,41.6 25,41.8 25.6,41.8 25.9,42.1 27.65,42.1 29.55,40.2 29.55,37
SW1 on Top Layer "Top Layer-SW1" (solid, pour order 14): 26.027,32.75 24.55,32.75 23.5,33.8 23.5,36.75 25.8,36.75 26.027,36.523
GND on Top Layer "Top Layer-GND" (solid, pour order 18): 26.25,37 21.5,37 21.5,39.75 22.8,41.05 22.8,42 23.75,42 26.25,39.5
SW1 on Top Layer "Top Layer-SW1 1" (solid, pour order 6): 21.5,42.1 21,41.6 21,40.8 21.1,40.7 22.2,40.7 22.4,40.9 22.4,41.775 22.075,42.1
SW1 on Top Layer "Top Layer-SW1 2" (solid, pour order 4): 24.25,41.5 24.25,40.75 24.3,40.7 24.3,38.8 24.2,38.7 23.8,38.7 23.7,38.8 23.7,40.7 23.75,40.75 23.75,41.5
GND on Top Layer "Top Layer-GND 1" (solid, pour order 2): 22.8,40.75 22.8,42.5 23.3,43 25,43 25.3,43.25 25.75,43.7 27.05,43.7 27.05,42.4 25.7,42.4 25.4,42.1 23.9,42.1 23.55,41.75 23.55,40.75
GND on Bottom Layer "Bottom Layer-GND" (solid, pour order 44): 0,70 0,0 48,0 48,70
SW1 on Bottom Layer "Bottom Layer-SW1" (solid, pour order 8): 24.75,40.55 23.8,41.5 21.05,41.5 21.05,40.5 22.3,40.5 23.25,39.55 23.25,34.25 24.75,34.25

## Silkscreen, mask and mechanical layers (free items; w line width, h text height)
Top Overlay:
  lines w0.15: 12,46.5 16.5,46.5 17.25,47.25 ; 12,48.5 14.75,48.5 15,48.75 ; 12.25,34 12.75,34
  text "A0" at 2.75,57.25 h2.2
  text "A1" at 2.75,55.25 h2.2
  text "A2" at 2.75,53.25 h2.2
  text "A3" at 2.75,51.25 h2.2
  text "A4" at 2.75,49.25 h2.2
  text "SDA" at 8.5,47.75 h2.8
  text "A5" at 2.75,47.25 h2.2
  text "SCL" at 8.5,45.75 h2.8
  text "GND" at 8.5,33.25 h2.8
  text "LINOBYTE" at 17.5,28.65 h3.8
  text "CHAR DISPLAY" at 17.5,23.4 h3.8
  text "WESLEY LEE" at 17.5,13.9 h3.8
  text "MAY" at 17.5,10.9 h3.8
  text "2018" at 23.15,10.9 h3.8
Top Solder:
  text "WES.AM" at 45.5,13.25 h8 r90
Mechanical 1:
  lines w0.15: 0,1 ccw(c1,1) 1,0 46.73,0 ccw(c46.73,1.27) 48,1.27 48,5 48,68.73 ccw(c46.73,68.73) 46.73,70 37,70 1.27,70 ccw(c1.27,68.73) 0,68.73 0,1
Mechanical 28:
  lines w0.15: 6.2,55.9 6.2,58.5 8.4,58.5 ; 6.4,53.8 6.4,50.9 8.9,50.9 ; 8.3,20.7 8.3,13.9 14.6,13.9 ; 10.9,32 16.2,32 16.2,27.6 ; 11.7,50.9 14.1,50.9 14.1,54.5 ; 11.7,58.6 14,58.6 14,56.2 ; 32.2,20.7 32.2,14 35.4,14 ; 35.4,32.1 39.3,32.1 39.3,26.9